# EAGLE board ChargeStepUpBoard2 (EAGLE 8.5.2)
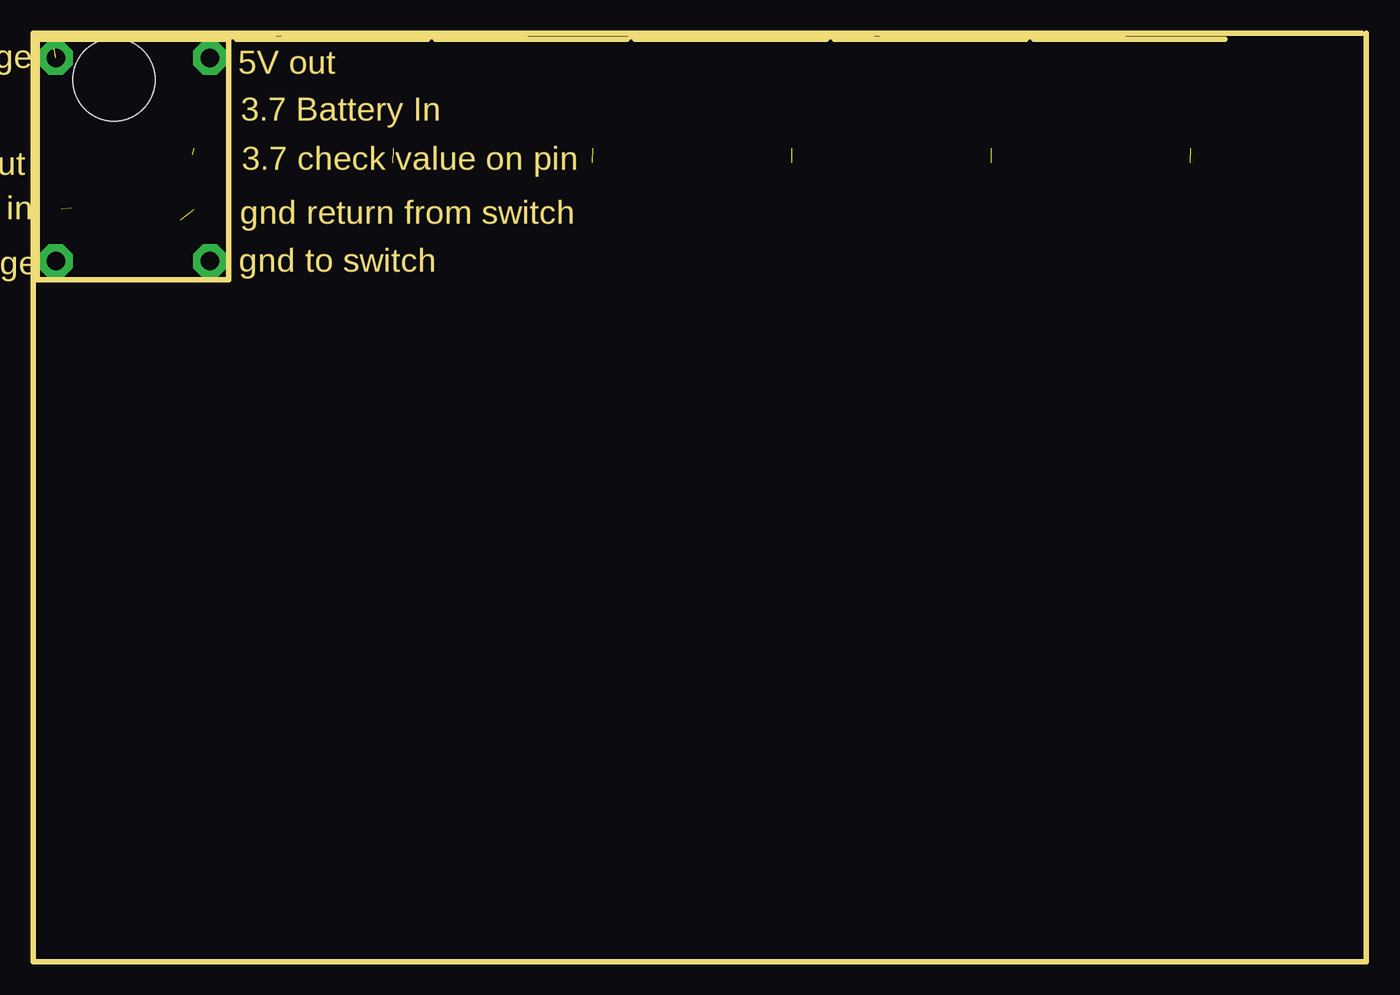
[diagram p0: board, top side]
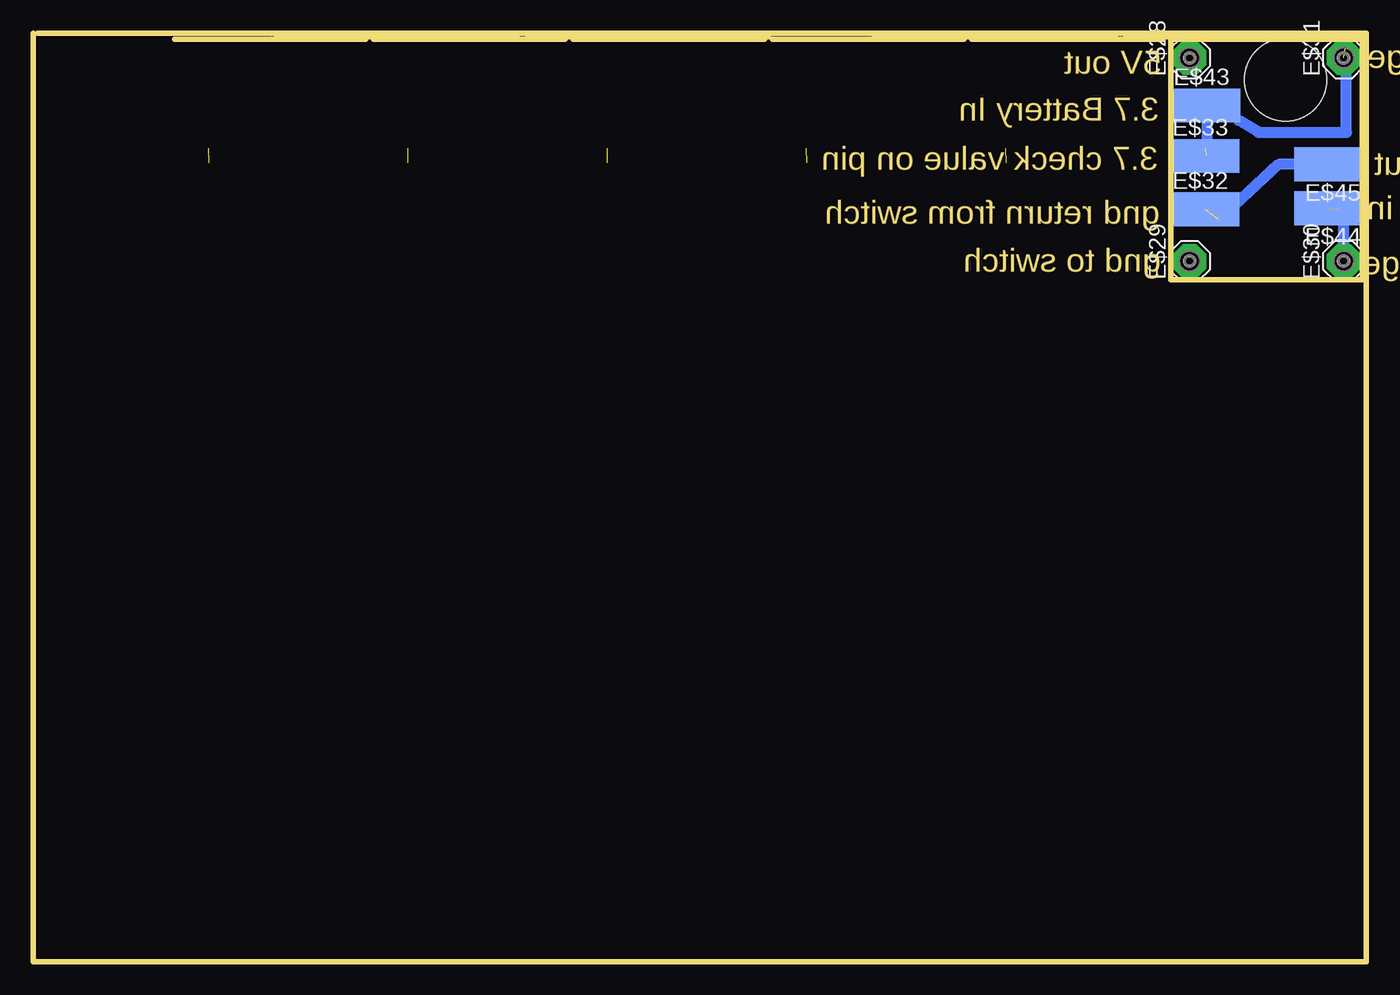
[diagram p1: board, bottom side, seen from below]

Size 100.33 x 69.85 mm. Coordinates in mm from the lower left corner, seen from the top.
Outline: 100,69.85 0,69.85 0,0 100.33,0 100.33,69.85
Outline: 18.1,69.6 0,69.6 0,55.2
Outline: 18.9,69.6 37,69.6
Outline: 44.7,69.4 30.3,69.4
Outline: 29.7,69.4 15.3,69.4
Outline: 45,69.6 63.1,69.6
Outline: 63.9,69.6 82,69.6
Outline: 59.7,69.4 45.3,69.4
Outline: 89.7,69.4 75.3,69.4
Outline: 74.7,69.4 60.3,69.4
Outline: 14.7,51.3 14.7,69.4 0.3,69.4 0.3,51.3 14.7,51.3
Copper layers (1*16): Top 0.035mm / dielectric 1.5mm / Bottom 0.035mm
Design rules "default": minimum track width 6mil, minimum drill 0.35mm, track to track 6mil, track to pad 6mil, pad to pad 6mil, via to via 6mil, smd to smd 6mil, copper to edge 40mil, drill to drill 6mil, minimum pad ring 10mil, minimum via ring 8mil, stop-mask expansion 4mil, vias tented up to drill 0mil, thermal gap 10mil
Holes 6.2 mm at 6.08,66.35

## Footprints (pad centres in the part's own frame; a part is rotated, then mirrored left to right if it is on the bottom)
SE14 = drill 1.397 pad 2.54 octagon: MP 0,0
SMD2,54-5,08 = smd 2.54 x 5.08: 1 0,0

## Placement (x,y rotation side)
E$28  [SE14]  13.3,68 90 bottom
E$29  [SE14]  13.3,52.7 90 bottom
E$30  [SE14]  1.7,52.7 90 bottom
E$31  [SE14]  1.7,68 90 bottom
E$32  [SMD2,54-5,08]  12.12,56.62 270 bottom
E$33  [SMD2,54-5,08]  12.12,60.62 270 bottom
E$43  [SMD2,54-5,08]  12.02,64.42 270 bottom
E$44  [SMD2,54-5,08]  2.88,56.69 90 bottom
E$45  [SMD2,54-5,08]  2.88,59.98 90 bottom

## Library data of the parts
E$28-E$31 = solpad
E$32 E$33 E$43-E$45 = wirepad

## Nets
S$1: E$32.1 E$45.1
S$14: E$30.MP E$44.1
S$15: E$31.MP E$33.1 E$43.1

## Tracks (layer width: path | path; a pad name or v marks a point on that pad's centre or on a via)
S$1  (1 unrouted)
  Bottom 0.813: E$45.1 6.62,59.98 11.1,55.8
S$3  (1 unrouted)
S$7  (1 unrouted)
S$9  (1 unrouted)
S$14  (1 unrouted)
  Bottom 0.152: 1.7,56.2 2.1,56.6
  Bottom 0.813: E$30.MP 1.7,56.2
S$15  (2 unrouted)
  Bottom 0.152: E$43.1 9.6,63.3 | 12.12,61.19 12.1,61.2 | 12.02,60.72 E$33.1
  Bottom 0.7: 1.5,66.9 arc-96 1.59,68.7
  Bottom 0.813: 9.6,63.3 8.1,62.4 1.5,62.4 1.5,66.9 | E$43.1 12.02,60.72
S$17  (1 unrouted)
S$20  (1 unrouted)
(copper drawn outside any net)
  shapes: Bottom circle x1

## Text on the board
Dimension: Mini stepUp connection adapter | connect to charge | 5V out | 3.7 Battery In | 3.7 check value on pin | gnd out | gnd battery in | gnd return from switch | connect to charge | gnd to switch
MyText: out + | in + | in - | out -